# EAGLE board USB Multiplicator 2025 (EAGLE 9.6.2)

Size 88 x 61 mm. Coordinates in mm from the lower left corner, seen from the top.
Outline: 6,0 82,0 83,0 arc90 88,5 88,56 arc90 83,61 82,61 6,61 5,61 arc90 0,56 0,5 arc90 5,0 6,0
Copper layers (1*16): Top 0.035mm / dielectric 1.5mm / Bottom 0.035mm
Design rules "default": minimum track width 10mil, minimum drill 24mil, track to track 8mil, track to pad 8mil, pad to pad 8mil, via to via 8mil, smd to smd 8mil, copper to edge 40mil, drill to drill 8mil, minimum pad ring 10mil, minimum via ring 8mil, stop-mask expansion 4mil, vias tented up to drill 0mil, thermal gap 10mil

## Footprints (pad centres in the part's own frame; a part is rotated, then mirrored left to right if it is on the bottom)
C025-030X050 = drill 0.813 pad 1.422 octagon: 1 -1.27,0; 2 1.27,0
3,3-PAD = drill 3.3 pad 5.842: B3,3 0,0
1X04 = drill 1.016 long: 1 -3.81,0; 2 -1.27,0; 3 1.27,0; 4 3.81,0
1206 = smd 1.6 x 1.803: A -1.422,0; C 1.422,0
SIP10 = drill 0.6 long: 1 -11.46,0; 2 -8.92,0; 3 -6.38,0; 4 -3.84,0; 5 -1.3,0; 6 1.24,0; 7 3.78,0; 8 6.32,0; 9 8.86,0; 10 11.4,0
EG1218 = drill 0.9 pad 1.676: O -2.54,0; P 0,0; S 2.54,0
USB-FEMALE-A-PTH = drill 0.9: D+ 5.9,1.3; D- 7.9,1.3; GND 3.4,1.3; VBUS 10.4,1.3 | drill 3: GND@1 13.5,4; GND@2 0.3,4
MOLEX_480371000 = smd 1.2 x 2: 1 3.5,2.6; 2 1,2.6; 3 -1,2.6; 4 -3.5,2.6 | drill 2.5: M1 -5.7,0; M2 5.7,0 | hole 1.1: -2.25,0; 2.25,0

## Placement (x,y rotation side)
C1_100MF  [C025-030X050]  64.7,12.5 0 top
H1  MOUNT-PAD-ROUND3.3  [3,3-PAD]  6,55 0 top
H2  MOUNT-PAD-ROUND3.3  [3,3-PAD]  6,6 0 top
H3  MOUNT-PAD-ROUND3.3  [3,3-PAD]  82,55 0 top
H4  MOUNT-PAD-ROUND3.3  [3,3-PAD]  82,6 0 top
JP1  [1X04]  67,58 0 top
LED_PWR  [1206]  45.63,14.44 0 top
LED_PWR1  [1206]  82,36 0 top
LED_PWR2  [1206]  6,36 0 top
RN1  [SIP10]  25,43 90 top
S1  [EG1218]  78,43 180 top
S2  [EG1218]  10,43 0 top
USB_OUT_1  USB  [USB-FEMALE-A-PTH]  80.5,27 270 top
USB_OUT_2  USB  [USB-FEMALE-A-PTH]  7.5,14 90 top
USB_OUT_WITH_DATA_1  USB  [USB-FEMALE-A-PTH]  38,53.5 0 top
X1  USB-A  [MOLEX_480371000]  42,2.7 0 top

## Library data of the parts
C1_100MF LED_PWR LED_PWR1 LED_PWR2 S1 S2 X1 = adafruit
H1-H4 = holes
JP1 = pinhead
RN1 = resistor-sip
USB_OUT_1 USB_OUT_2 USB_OUT_WITH_DATA_1 = STUNTAZ

## Nets
GND: C1_100MF.1 JP1.4 RN1.1 USB_OUT_1.GND USB_OUT_2.GND USB_OUT_WITH_DATA_1.GND X1.4
N$1: USB_OUT_WITH_DATA_1.D- X1.2
N$2: USB_OUT_WITH_DATA_1.D+ X1.3
R1: LED_PWR.C RN1.2
R2: LED_PWR1.C RN1.3
R3: LED_PWR2.C RN1.4
R4: RN1.5
R5: RN1.6
R6: RN1.7
R7: RN1.8
R8: RN1.9
VCC: C1_100MF.2 JP1.1 LED_PWR.A S1.P S2.P USB_OUT_WITH_DATA_1.VBUS X1.1
VCC_USB_2: LED_PWR2.A S2.O USB_OUT_2.VBUS
VCC_USB_3: LED_PWR1.A S1.O USB_OUT_1.VBUS

## Tracks (layer width: path | path; a pad name or v marks a point on that pad's centre or on a via)
GND  (6 unrouted)
N$1  (1 unrouted)
N$2  (1 unrouted)
R1  (1 unrouted)
R2  (1 unrouted)
R3  (1 unrouted)
VCC  (6 unrouted)
VCC_USB_2  (2 unrouted)
VCC_USB_3  (2 unrouted)

## Text on the board
tNames: VCC 5V | GND | GND | ON / OFF | OFF / ON | + | + | GND | GND | GND | + | POWER | + | GND | USB Multiplicator
bNames: USB Multiplicator / / / www.FredericTorres.com | PCBv4 - 2025.07